# EAGLE board piduino (EAGLE 7.7.0)
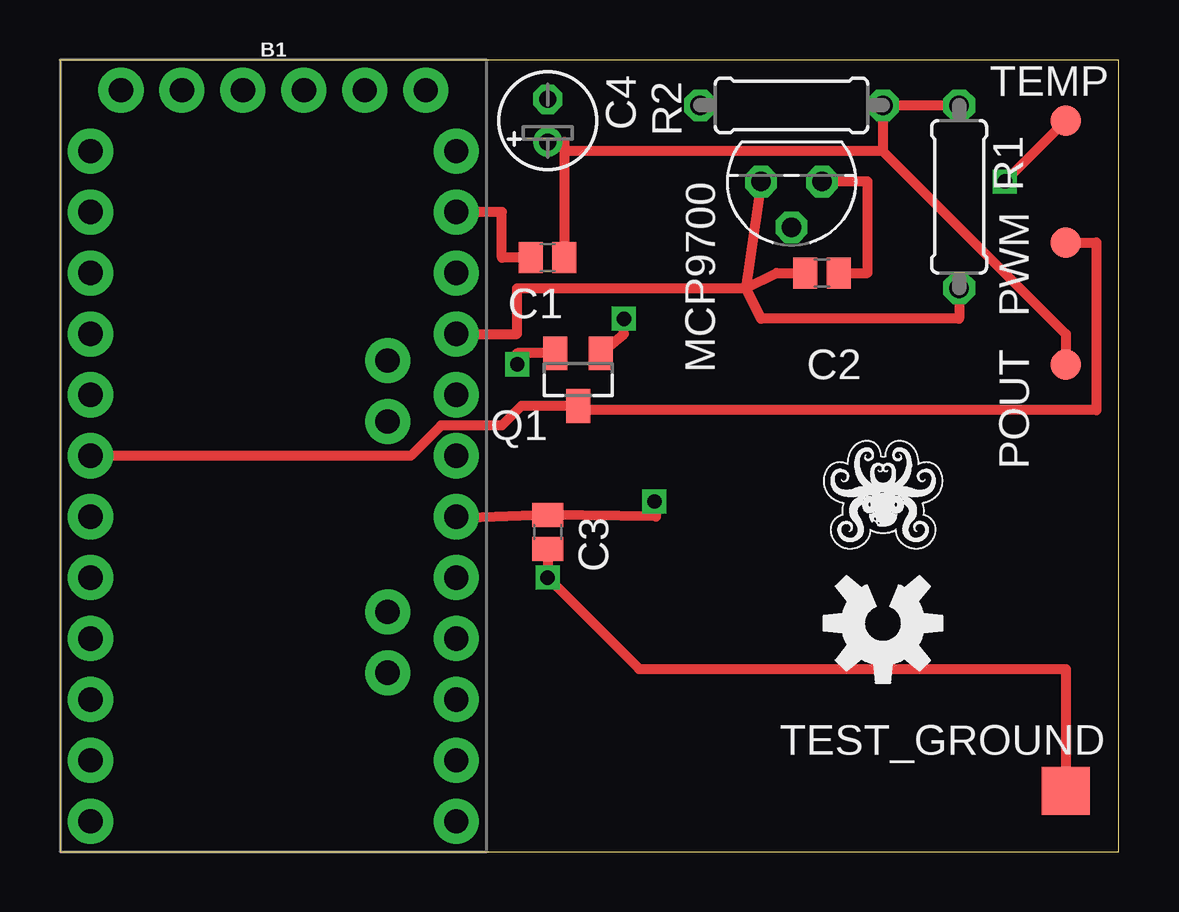
[diagram p0: board, top side]
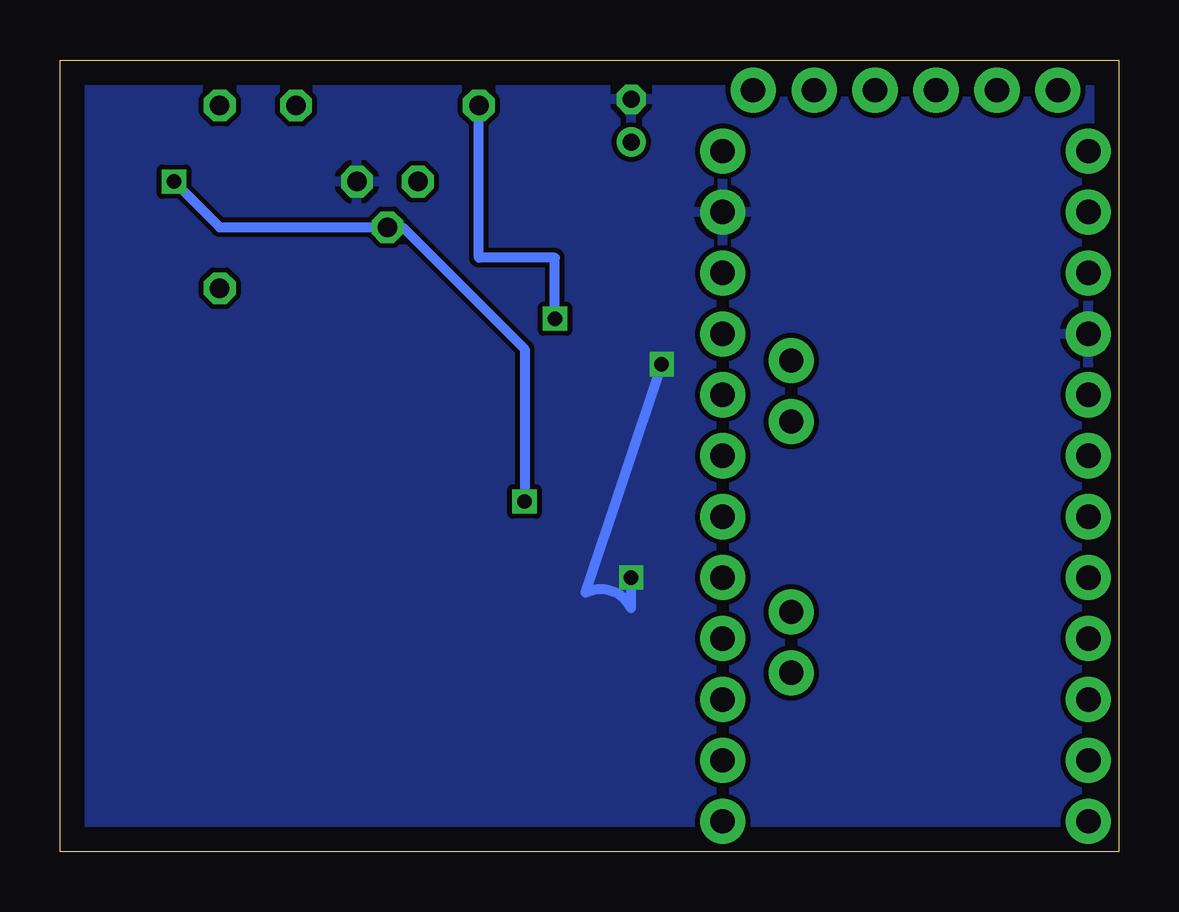
[diagram p1: board, bottom side, seen from below]

Size 44.12 x 33.01 mm. Coordinates in mm from the lower left corner, seen from the top.
Outline: 0,0 44.12,0 44.12,33.01 0,33.01 0,0
Copper layers (1*16): Top 0.035mm / dielectric 1.5mm / Bottom 0.035mm
Design rules "default": minimum track width 10mil, minimum drill 24mil, track to track 8mil, track to pad 8mil, pad to pad 8mil, via to via 8mil, smd to smd 8mil, copper to edge 40mil, drill to drill 8mil, minimum pad ring 10mil, minimum via ring 8mil, stop-mask expansion 4mil, vias tented up to drill 0mil, thermal gap 10mil

## Footprints (pad centres in the part's own frame; a part is rotated, then mirrored left to right if it is on the bottom)
ARDUINO_PRO_MINI = drill 1.016 pad 1.88: 1 -7.62,12.7; 2 -7.62,10.16; 3 -7.62,7.62; 4 -7.62,5.08; 5 -7.62,2.54; 6 -7.62,0; 7 -7.62,-2.54; 8 -7.62,-5.08; 9 -7.62,-7.62; 10 -7.62,-10.16; 11 -7.62,-12.7; 12 -7.62,-15.24; 13 7.62,-15.24; 14 7.62,-12.7; 15 7.62,-10.16; 16 7.62,-7.62; 17 7.62,-5.08; 18 7.62,-2.54; 19 7.62,0; 20 7.62,2.54; 21 7.62,5.08; 22 7.62,7.62; 23 7.62,10.16; 24 7.62,12.7; A4 4.763,1.429; A5 4.763,3.969; A6 4.763,-9.049; A7 4.763,-6.509; BLK -6.35,15.24; GND -3.81,15.24; GRN 6.35,15.24; RXI 1.27,15.24; TXO 3.81,15.24; VCC -1.27,15.24
C1310 = smd 1 x 1.3: 1 -0.7,0; 2 0.7,0
E1,8-4 = drill 0.711 pad 1.168: + -0.889,0 | drill 0.711 pad 1.168 octagon: - 0.889,0
TO92 = drill 0.813 octagon: 1 1.27,0; 2 0,1.905; 3 -1.27,0
B1,27 = smd 1.27 x 1.27: TP 0,0
SOT23 = smd 1 x 1.4: 1 -0.95,-1.1; 2 0.95,-1.1; 3 0,1.1
0207/7 = drill 0.813 octagon: 1 -3.81,0; 2 3.81,0
TP20SQ = smd 2 x 2: TP 0,0

## Placement (x,y rotation side)
B1  ARDUINO_PRO_MINI  [ARDUINO_PRO_MINI]  8.89,16.51 0 top
C1  10uF  [C1310]  20.32,24.76 180 top
C2  10uF  [C1310]  31.75,24.13 0 top
C3  10uF  [C1310]  20.32,13.34 270 top
C4  100uF  [E1,8-4]  20.32,30.48 90 top
MCP9700  MCP970XTO  [TO92]  30.48,27.94 180 top
POUT  PTR1B1,27  [B1,27]  41.91,20.32 270 top
PWM  PTR1B1,27  [B1,27]  41.91,25.4 270 top
Q1  2N7002P  [SOT23]  21.59,19.68 180 top
R1  100  [0207/7]  37.47,27.3 270 top
R2  30  [0207/7]  30.48,31.12 0 top
TEMP  PTR1B1,27  [B1,27]  41.91,30.48 270 top
TEST_GROUND  TPTP20SQ  [TP20SQ]  41.91,2.54 180 top
U$1  [SFE_LUDUS-S]  34.29,15.24 180 top
U$2  [OSHW-LOGO-M]  34.29,9.52 180 top

## Library data of the parts
B1 = SparkFun-Boards
C1-C4 R1 R2 = resistor
MCP9700 = mcp970x
POUT PWM TEMP TEST_GROUND = testpad
Q1 = transistor-fet
U$1 U$2 = SparkFun-Aesthetics

## Nets
GND: B1.4 B1.23 C1.2 C2.2 C3.2 C4.- MCP9700.3 Q1.2 TEST_GROUND.TP
N$1: C1.1 C4.+ POUT.TP R1.1 R2.2
N$2: Q1.1 R2.1
N$4: B1.6 PWM.TP Q1.3
RAW: B1.24
VCC: B1.21 C2.1 MCP9700.1 R1.2
VOUT: B1.18 C3.1 MCP9700.2 TEMP.TP

## Tracks (layer width: path | path; a pad name or v marks a point on that pad's centre or on a via)
GND  (via drill 0.6)
  Top 0.406: C3.2 v20.32,11.43 24.13,7.62 41.91,7.62 TEST_GROUND.TP | Q1.2 19.05,20.79 v19.05,20.32 | C1.2 18.41,24.76 18.41,26.67 B1.23 | C2.2 33.66,24.13 33.66,27.94 MCP9700.3
  Bottom 0.406: v19.05,20.32 22.23,10.79 arc90 20.32,10.16 v20.32,11.43
  pour Bottom: 0,33.02 44.45,33.02 43.81,0 0,0
N$1
  Top 0.406: R1.1 R2.2 34.29,29.21 | 34.29,29.21 41.91,21.59 POUT.TP | C4.+ 21.02,29.59 21.02,29.21 | 21.02,29.21 C1.1 | 34.29,29.21 21.02,29.21
N$2  (via drill 0.6)
  Top 0.406: Q1.1 23.5,21.59 v23.5,22.23
  Bottom 0.406: v23.5,22.23 23.5,24.76 26.67,24.76 R2.1
N$4
  Top 0.406: B1.6 14.61,16.51 15.88,17.78 18.41,17.78 19.22,18.59 Q1.3 21.76,18.41 43.18,18.41 43.18,25.4 PWM.TP
VCC
  Top 0.406: B1.21 19.05,21.59 19.05,23.49 28.57,23.49 | 28.57,23.49 29.84,24.13 C2.1 | MCP9700.1 28.57,23.49 | R1.2 37.47,22.23 29.21,22.23 28.57,23.49
VOUT  (via drill 0.6)
  Top 0.406: TEMP.TP v39.37,27.94 | v24.77,14.6 24.83,13.97 C3.1 16.45,13.91 B1.18
  Bottom 0.406: v39.37,27.94 37.47,26.04 MCP9700.2 29.84,26.04 24.77,20.95 v24.77,14.6